# Altium PCB Rev 1.0.PcbDoc
Units mil, origin at the board's own origin, x right, y up, seen from the top; angles counter-clockwise.
Board outline 19020 x 8775 mil, 2 copper layers (Top Layer, Bottom Layer); 52 components, 22 nets, 145 pads, 0 vias.
Unrouted connection lines stored in the file: 7.
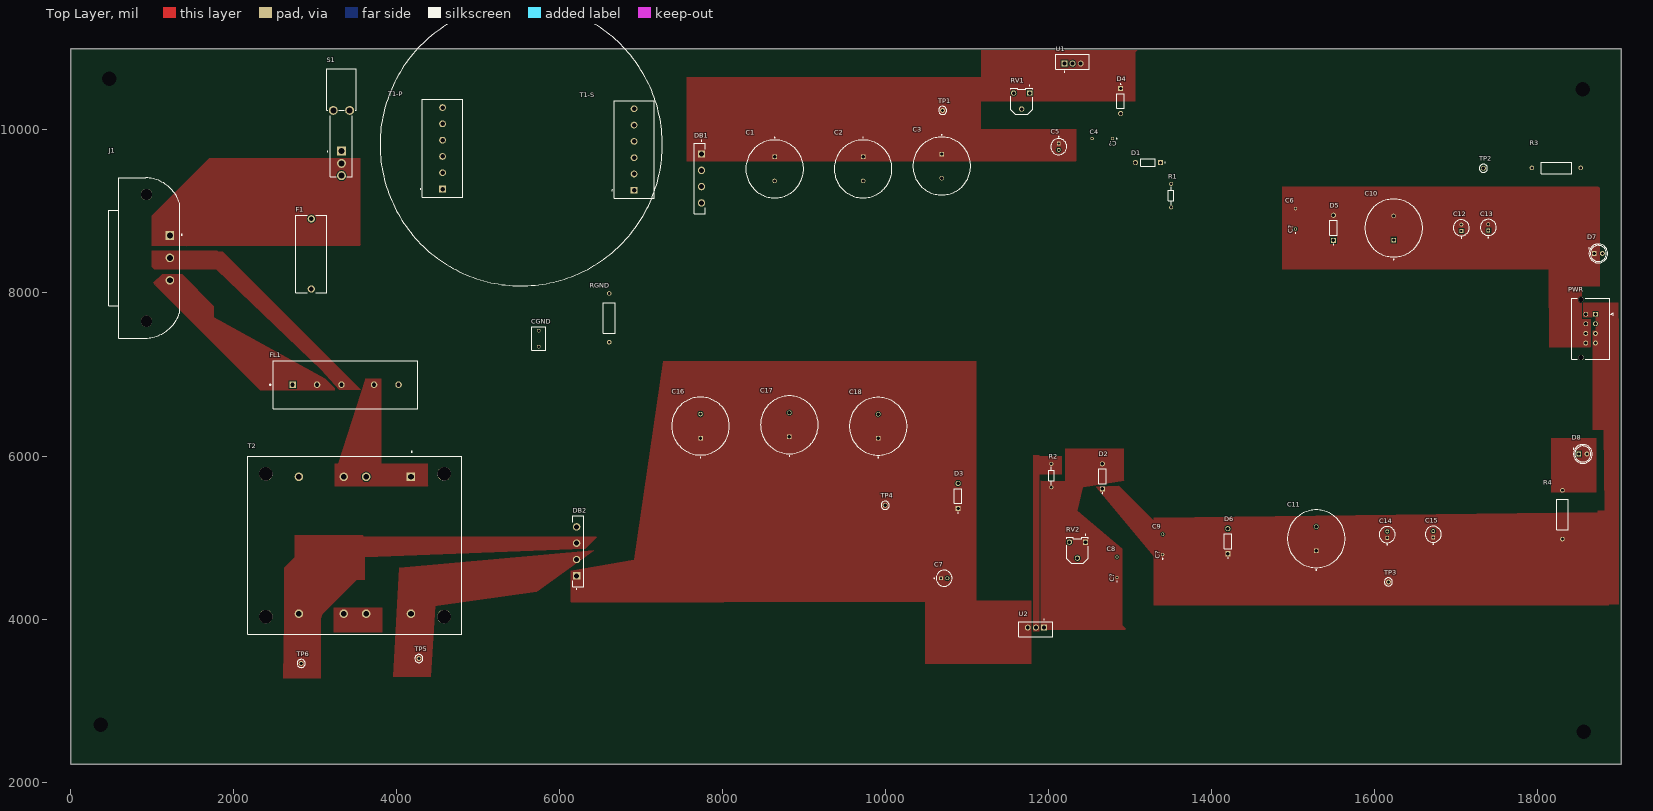
[diagram p0: Top Layer view]
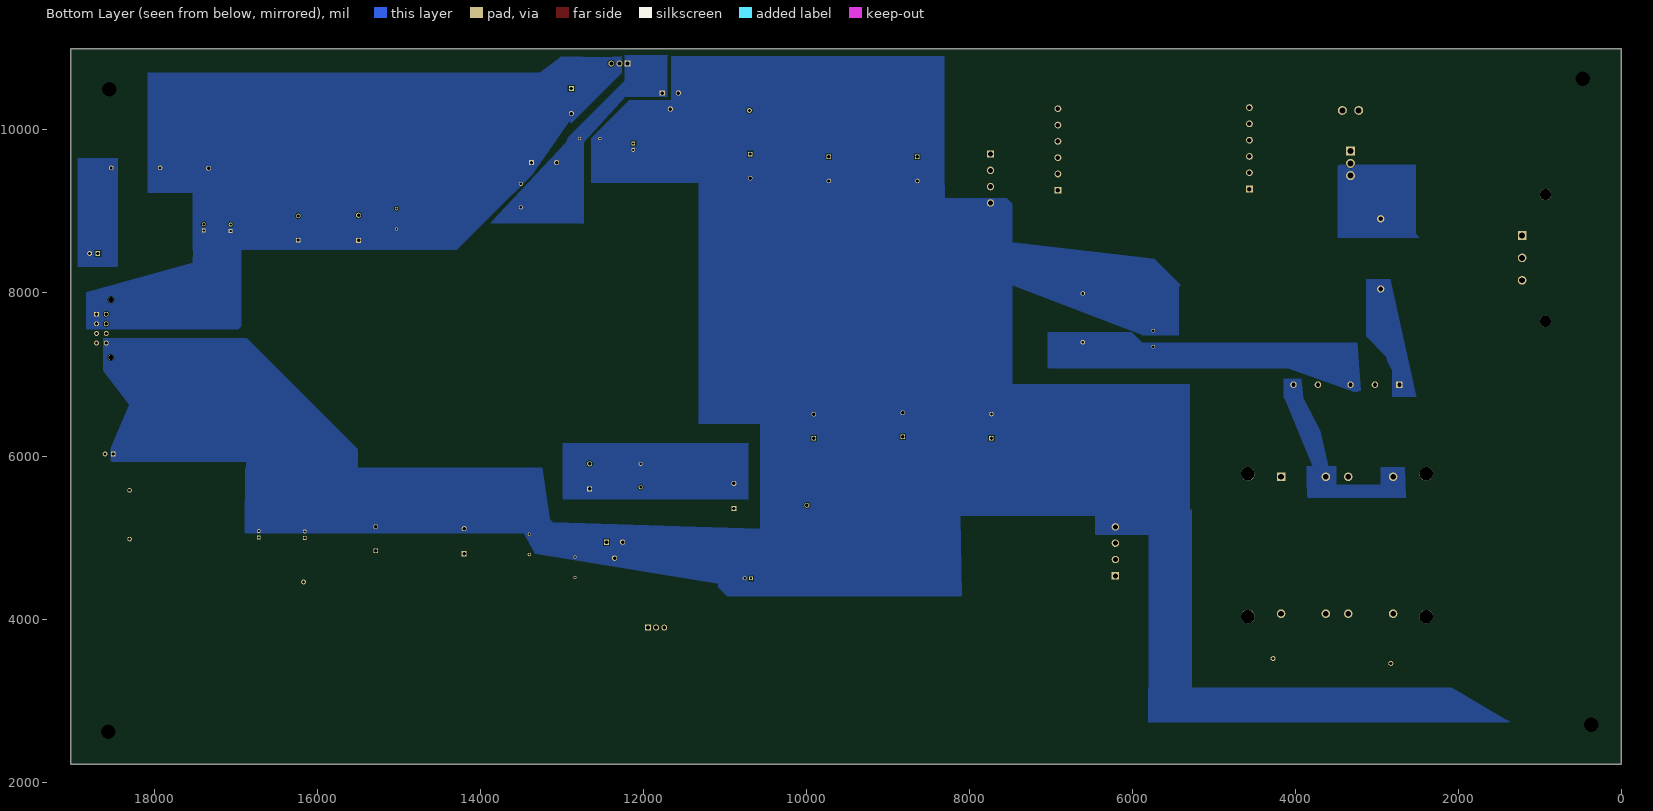
[diagram p1: Bottom Layer view, seen from below]
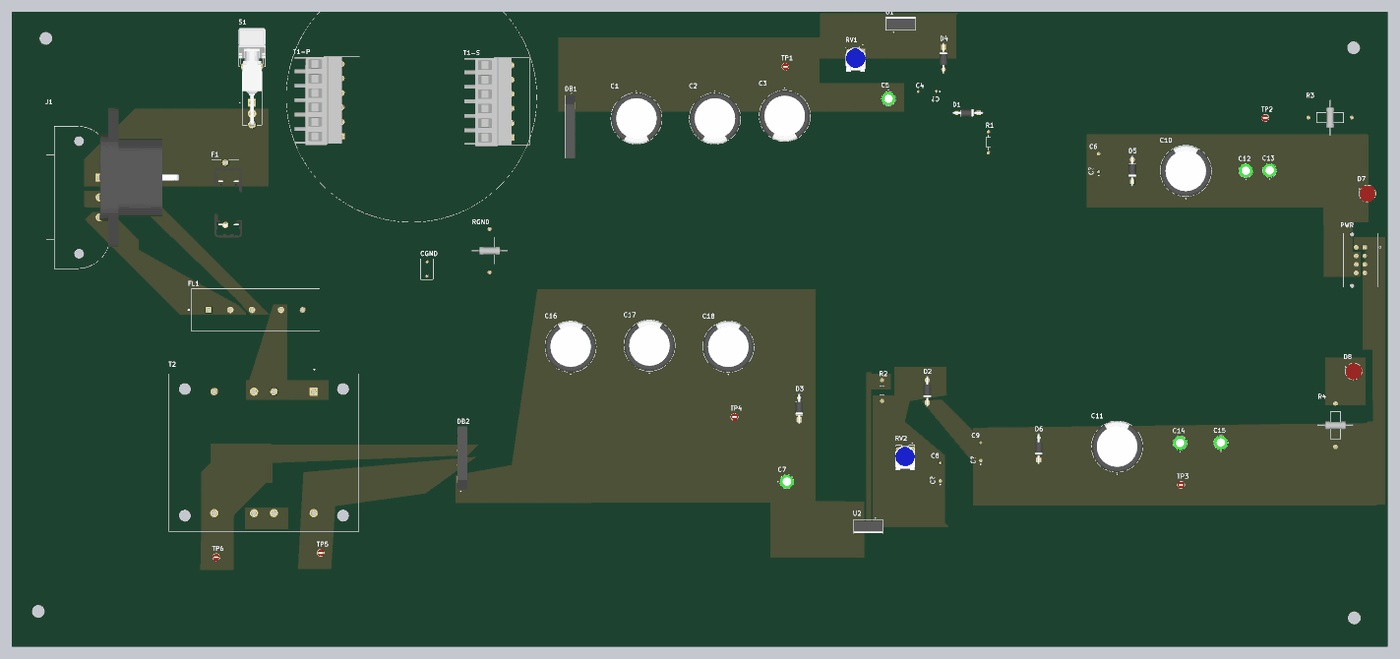
[diagram p2: 3D render of the assembled board from above, using the file's embedded part models]

## Layer stack, top to bottom
Top Solder: solder mask 0.4, Solder Resist, Dk 3.5
Top Layer: signal copper 1.4
Dielectric 1: dielectric 12.6, FR-4, Dk 4.8
Bottom Layer: signal copper 1.4
Bottom Solder: solder mask 0.4, Solder Resist, Dk 3.5

## Board outline
0,2220 19020,2220 19020,10995 0,10995

## Design rules (kind name [scope] priority, off if disabled: settings)
Clearance [All] p1: gap=10 ignorepadtopadclearanceinfootprint=FALSE except(0: Arc-Hole Track-Hole SMDPad-Hole THPad-Hole Via-Hole Fill-Hole Poly-Hole Region-Hole Text-Hole)
PolygonConnect [All] p1: connectstyle=Relief reliefconductorwidth=10 reliefentries=4 polygonreliefangle="90 Angle" airgapwidth=10
RoutingVias [All] p1: holewidth=28 width=50 viastyle="Through Hole" minholewidth=28 minwidth=50 maxholewidth=28 maxwidth=50
SolderMaskExpansion [All] p1: expansion=4 istentingtop=FALSE
Width [All] p1: maxlimit=10 minlimit=10 preferedwidth=10
30 further rules are at their usual default settings.

## Components (designator, comment, footprint, x,y, rotation, side; value= is the part's Value field where it differs from the comment)
C1 "UVZ1H332MHD" CAPPRD750W80D1800H3550 8635,9522.36 r270 top
C2 "UVZ1H332MHD" CAPPRD750W80D1800H3550 9720,9522.36 r270 top
C3 "UVZ1H332MHD" CAPPRD750W80D1800H3550 10685,9557.36 r270 top
C4 "10u" "6.35mm Tantalum Radial" 12780,9895 r180 top
C5 "0.1u" CAPPRD200W50D550H1250 12120,9795 r270 top
C6 "1u" "6.35mm Tantalum Radial" 15025,8785 r90 top
C7 "0.1u" CAPPRD200W50D550H1250 10714.37,4500 r0 top
C8 "10u" "6.35mm Tantalum Radial" 12835,4510 r90 top
C9 "1u" "6.35mm Tantalum Radial" 13395,4790 r90 top
C10 "4700u" CAPPRD750W80D1800H3550 16230,8797.36 r90 top
C11 "4700u" CAPPRD750W80D1800H3550 15280,4985 r90 top
C12 "0.1u" CAPPRD200W50D550H1250 17060,8800 r90 top
C13 "0.1u" CAPPRD200W50D550H1250 17390,8805 r90 top
C14 "0.1u" CAPPRD200W50D550H1250 16150,5035 r90 top
C15 "0.1u" CAPPRD200W50D550H1250 16715,5040 r90 top
C16 "UVZ1H332MHD" CAPPRD750W80D1800H3550 7725,6367.36 r90 top
C17 "UVZ1H332MHD" CAPPRD750W80D1800H3550 8815,6382.64 r90 top
C18 "UVZ1H332MHD" CAPPRD750W80D1800H3550 9905,6365 r90 top
CGND "0.1u Film" CAPRR500W50L730T450H950 5740,7440 r90 top
D1 "1N4007-T" DIOAD780W78L463D236 13215,9600 r180 top
D2 "1N4007-T" DIOAD780W78L463D236 12655,5750 r90 top
D3 "1N4007-T" DIOAD780W78L463D236 10885,5510 r90 top
D4 "1N4007-T" DIOAD780W78L463D236 12880,10355 r270 top
D5 "1N4007-T" DIOAD780W78L463D236 15490,8800 r90 top
D6 "1N4007-T" DIOAD780W78L463D236 14195,4955 r90 top
D7 "WP7113ID" LED_WP7113ID 18740,8485 r0 top
D8 "WP7113ID" LED_WP7113ID 18550,6025 r0 top
DB1 "GBU801" SIP343W114P508L2205H2134Q4 7715,9405 r270 top
DB2 "GBU801" SIP343W114P508L2205H2134Q4 6227.05,4830 r90 top
F1 "4527" FUSE_4527 2950,8480 r270 top
FL1 "FN406-3-02" FIL_FN406-3-02 3370,6875 r0 top
J1 "703W-00/52" QUALTEK_703W-00/52 1215,8706.18 r270 top
PWR "452800801" MOLEX_452800801 18705,7740 r90 top
R1 "270" RESAD730W45L360D200 13500,9195 r90 top
R2 "270" RESAD730W45L360D200 12030,5760 r90 top
R3 "1.1k" RESAD1520W70L1030D380 18225,9535 r0 top
R4 "200" RESAD1520W70L1030D380 18300,5280 r90 top
RGND "200" RESAD1520W70L1030D380 6605,7695 r90 top
RV1 "5k" TRIM_3306F-1-502 11665,10355 r90 top
RV2 "1k" TRIM_3306F-1-502 12350,4845 r90 top
S1 "300SP1J1BLKM7QE" SW_300SP1J1BLKM7QE 3320,9590 r270 top
T1-P "282847-6" TE_282847-6 4560,9775 r90 top
T1-S "282847-6" TE_282847-6 6910,9760 r90 top
T2 "VPP10-3000" XFMR_VPP10-3000 3485,4905 r270 top
TP1 "5000" KEYSTONE_5000 10695,10240 r0 top
TP2 "5000" KEYSTONE_5000 17330,9530 r0 top
TP3 "5000" KEYSTONE_5000 16165,4455 r0 top
TP4 "5000" KEYSTONE_5000 9990,5395 r0 top
TP5 "5000" KEYSTONE_5000 4270,3515 r0 top
TP6 "5000" KEYSTONE_5000 2825,3455 r0 top
U1 "LM338T" TO254P1054X470X1955-3 12290,10815 r0 top
U2 "LM338T" TO254P1054X470X1955-3 11840,3895 r180 top

## Footprints (in the part's own frame and the unit in brackets; to place one, negate y for a bottom-side part, rotate by r counter-clockwise, add the part's x,y. Pads: shape width x height; smd on the part's side, far side on the other; paste and mask are expansions set on the pad)
"6.35mm Tantalum Radial" [mil]
  round 40 hole 25: N(250,0) P(0,0)
  silkscreen extent -55,-5 -45,5
CAPPRD200W50D550H1250 [mm]
  rect 1.208x1.208 hole 0.7: 1(-1,0)
  round 1.208 hole 0.7: 2(1,0)
  silkscreen extent -3.2,-2.5 2.5,2.5, body extent -2.5,-2.49 2.5,2.49, height 12
CAPPRD750W80D1800H3550 [mm]
  round 1.4 hole 1.05: N(3.75,0)
  rect 1.4x1.4 hole 1.05: P(-3.75,0)
  silkscreen extent -9.85,-9 9,9, body extent -8.97,-9 9,9, height 35.5
CAPRR500W50L730T450H950 [mm]
  round 1.1 hole 0.75: 1(-2.5,0) 2(2.5,0)
  silkscreen extent -3.65,-2.25 3.65,2.25
DIOAD780W78L463D236 [mm]
  round 1.59 hole 1.06: A(3.905,0)
  rect 1.59x1.59 hole 1.06: K(-3.905,0)
  silkscreen extent -5.35,-1.18 2.32,1.18, body extent -5.47,-1.35 5.47,1.35, height 2.68
FIL_FN406-3-02 [mm]
  rect 2.03x2.03 hole 1.35: 1(-16.51,0)
  round 2.03 hole 1.35: 2(-8.89,0) 3(-1.27,0) 4(8.89,0) 5(16.51,0)
  silkscreen extent -23.7,-7.5 22.5,7.5
FUSE_4527 [mm]
  round 2.25 hole 1.5: 1(-10.92,0) 2(10.92,0)
  silkscreen extent -12.08,-4.85 12.08,4.85, body extent -8.9,-3.75 15.26,5.95, height 4.55
KEYSTONE_5000 [mm]
  round 1.53 hole 1.02: TP(0,0)
  silkscreen extent -1.27,-1.27 1.27,1.27, body extent -1.26,-1.27 1.26,1.27, height 4.57
LED_WP7113ID [mm]
  round 1.508 hole 1: A(1.27,0)
  rect 1.508x1.508 hole 1: C(-1.27,0)
  silkscreen extent -3.03,-2.95 2.95,2.95, body extent -2.5,-2.95 2.93,2.95, height 9.6
MOLEX_452800801 [mm]
  rect 1.505x1.505 hole 1.005 mask+0.076: 1(0,0)
  round 1.505 hole 1.005 mask+0.076: 2(-3,0) 3(-6,0) 4(-9,0) 5(0,3) 6(-3,3) 7(-6,3) 8(-9,3)
  round 1.57 hole 1.57 unplated mask+0.076: ""(-13.5,4.45) ""(4.5,4.45)
  silkscreen extent -14,-5.49 5,7.45
QUALTEK_703W-00/52 [mm]
  rect 2.7x2.7 hole 1.8: 1(0,0)
  round 2.7 hole 1.8: 2(7,0) 3(14,0)
  round 3.5 hole 3.5 unplated: ""(-12.75,-7.3) ""(26.75,-7.3)
  silkscreen extent -18,-19 32,3.85, body extent -25.05,0 25.05,27.79, height 11.5
RESAD730W45L360D200 [mm]
  round 1.238 hole 0.73: 1(-3.65,0) 2(3.65,0)
  silkscreen extent -2.8,-0.85 2.8,0.85
RESAD1520W70L1030D380 [mm]
  round 1.408 hole 0.9: 1(-7.6,0) 2(7.6,0)
  silkscreen extent -4.75,-1.8 4.75,1.8, body extent -1.39,-6.3 1.39,6.3, height 1.4
SIP343W114P508L2205H2134Q4 [mm]
  round 2.31 hole 1.54: AC1(-2.54,0.56) AC2(2.54,0.56) NEG(7.62,0.56)
  rect 2.31x2.31 hole 1.54: POS(-7.62,0.56)
  silkscreen extent -11.86,-1.72 11.02,1.72, body extent -11.02,-1.72 11.02,1.72, height 21.55
SW_300SP1J1BLKM7QE [mm]
  rect 2.775x2.775 hole 1.85: 1(-3.81,0)
  round 2.775 hole 1.85: 2(0,0) 3(3.81,0) S1(-16.51,-2.54) S2(-16.51,2.54)
  silkscreen extent -29.54,-4.63 4.19,4.63, body extent -30.14,-4.72 4.19,4.72, height 17.1
TE_282847-6 [mm]
  rect 2.1x2.1 hole 1.4: 1(-12.7,0)
  round 2.1 hole 1.4: 2(-7.62,0) 3(-2.54,0) 4(2.54,0) 5(7.62,0) 6(12.7,0)
  silkscreen extent -15.24,-6.25 15.24,6.95, body extent -15.74,0 15.24,17.14, height 4.18
TO254P1054X470X1955-3 [mm]
  rect 1.86x1.86 hole 1.24: 1(-2.54,0)
  round 1.86 hole 1.24: 2(0,0) 3(2.54,0)
  silkscreen extent -5.27,-2.64 5.27,2.86, body extent -5.08,-1.49 5.08,2.71, height 22.86
TRIM_3306F-1-502 [mm]
  rect 1.65x1.65 hole 1.1: 1(2.5,-2.5)
  round 1.65 hole 1.1: 2(-2.5,0) 3(2.5,2.5)
  silkscreen extent -4.05,-3.4 4.9,3.4, body extent -4.7,-3.4 3.4,3.4, height 8.38
XFMR_VPP10-3000 [mil]
  rect 105x105 hole 70: 1(-840,687.5)
  round 105 hole 70: 3(-840,137.5) 4(-840,-137.5) 6(-840,-687.5) 7(840,687.5) 9(840,137.5) 10(840,-137.5) 12(840,-687.5)
  round 166 hole 166 unplated: ""(-875,1093.5) ""(-875,-1093.5) ""(875,1093.5) ""(875,-1093.5)
  silkscreen extent -1153,-1313 1094,1313

## Part data
C1 C2 C3 C4 C6 C8 C9 C10 C11 C16 C17 C18: library part ECA1VHG472, "NHG-A", Package=None, Availability=Unavailable, MF="{'manufacturer': u'Panasonic'}", MP=ECA1VHG472, Price=None
C5 C7 C12 C13 C14 C15: library part UVR1H0R1MDD, "0.47ÂµF 100V Aluminum Electrolytic Capacitors Radial, Can 2000 Hrs @ 85Â°C", Package=None, Availability=Unavailable, MF="{'manufacturer': u'Nichicon'}", MP=UVR1H0R1MDD, Price=None
CGND: library part B32529C3104K289, Package=None, Availability=Unavailable, MF="{'manufacturer': u'EPCOS'}", MP=B32529C3104K289, Price=None
D1 D2 D3 D4 D5 D6 DB1 DB2 F1 PWR S1 T1-P T1-S TP1 TP2 TP3 TP4 TP5 TP6: Package=None, Availability=Unavailable, Price=None
  D1 D2 D3 D4 D5 D6: MF="{'manufacturer': u'Diodes Incorporated'}", MP=1N4007-T
  DB1 DB2: MF="{'manufacturer': u'Diodes Inc.'}", MP=GBU801
  F1: MF="{'manufacturer': u'Keystone'}", MP=4527
  PWR: MF="{'manufacturer': u'Molex'}", MP=452800801
  S1: MF="{'manufacturer': u'E-Switch'}", MP=300SP1J1BLKM7QE
  T1-P T1-S: MF="{'manufacturer': u'TE Connectivity'}", MP=282847-6
  TP1 TP2 TP3 TP4 TP5 TP6: MF="{'manufacturer': u'Keystone Electronics'}", MP=5000
D7 D8: "LED; Thru-Hole; Green; T1-3/4; 5mm; Clear Lens; 25ma; 565nm; 200mcd; Round", Package=None, Availability=Unavailable, MF="{'manufacturer': u'Kingbright'}", MP=WP7113ID, Price=None
FL1: "Single Phase EMC/EMI Line Filter 3A 250VAC DC ~ 400Hz Single Stage PC Pins", Package=None, Availability=Unavailable, MF="{'manufacturer': u'Schaffner EMC'}", MP=FN406-3-02, Price=None
J1: "3 Position 250 V 10 A Male Pins AC Receptacle Right Angle Connector", Package=None, Availability=Unavailable, MF="{'manufacturer': u'Qualtek'}", MP=703W-00/52, Price=None
R1 R2: library part CF18JT680R, "Res Carbon Film 680 Ohm 5% 0.125W(1/8W) -400ppm/C to 0ppm/C Conformal Coated AXL T/R", Package=None, Availability=Unavailable, MF="{'manufacturer': u'Stackpole Electronics'}", MP=CF18JT680R, Price=None
R3 R4 RGND: library part CBT50J5R1, "5.1 Ohms +/-5% 0.5W, 1/2W Through Hole Resistor Axial Pulse Withstanding Carbon Composition", Package=None, Availability=Unavailable, MF="{'manufacturer': u'TE Connectivity / AMP'}", MP=CBT50J5R1, Price=None
RV1 RV2: library part 3306F-1-502, "2 kOhms 0.2W, 1/5W PC Pins Through Hole Trimmer Potentiometer Cermet 1 Turn Top Adjustment", Package=None, Availability=Unavailable, MF="{'manufacturer': u'Bourns'}", MP=3306F-1-502, Price=None
T2: "Power Transformer 4000Vrms Dual Prim. Dual Sec. 230V/115V Prim. 10V/5V Sec. Through Hole", Package=None, Availability=Unavailable, MF="{'manufacturer': u'Triad Magnetics'}", MP=VPP10-3000, Price=None
U1 U2: library part LM338T/NOPB-ND

## Free pads (board coordinates)
  round 60 hole 177.17: 2(470,10630) 3(365,2705) 4(18560,2615) 5(18550,10500)

## Nets (pads, with @x,y where several pads share a name; then routed paths per layer and width w, separated by ;. In a path a pad name is that pad's centre, name@x,y a point inside that pad or via, vN(x,y) a via of type N, cw(c..) or ccw(c..) an arc to the next point about the centre after c; other vN are vias at no path point)
+5: C9.P C11.P C14.1 C15.1 D2.K D3.A D6.K PWR.3 PWR.4 PWR.5 R2.2 R4.1 TP3.TP U2.2
+12: C7.1 C16.P C17.P C18.P D3.K DB2.POS TP4.TP U2.3
+24: C6.P C10.P C12.1 C13.1 D1.K D4.A D5.K PWR.1 PWR.2 R1.2 R3.1 TP2.TP U1.2
+32: C1.P C2.P C3.P C5.1 D4.K DB1.POS TP1.TP U1.3
_N: FL1.4 T1-P.3 T1-P.6 T2.1 T2.4
_P: FL1.5 T1-P.1 T1-P.4 T2.3 T2.6
Earth: CGND.1 FL1.3 J1.2 RGND.1
GND: C1.N C2.N C3.N C4.N C5.2 C6.N C7.2 C8.N C9.N C10.N C11.N C12.2 C13.2 C14.2 C15.2 C16.N C17.N C18.N CGND.2 D5.A D6.A D7.C D8.C DB1.NEG DB2.NEG PWR.6 PWR.7 PWR.8 RGND.2 RV1.2 RV1.3 RV2.2 RV2.3
NetC4_P: C4.P D1.A R1.1 RV1.1 U1.1
NetC8_P: C8.P D2.A R2.1 RV2.1 U2.1
NetD7_A: D7.A R3.2
NetD8_A: D8.A R4.2
NetF1_1: F1.1 S1.3
NetF1_2: F1.2 FL1.1
NetFL1_2: FL1.2 J1.3
NetJ1_1: J1.1 S1.2
NetT1-S_3: T1-S.3 T1-S.4
NetT2_9: T2.9 T2.10
T1_O1: DB1.AC2 T1-S.1
T1_O2: DB1.AC1 T1-S.6
T2_O1: DB2.AC2 T2.12 TP6.TP
T2_O2: DB2.AC1 T2.7 TP5.TP
pads on no net: J1. PWR. S1.1 S1.S1 S1.S2 T1-P.2 T1-P.5 T1-S.2 T1-S.5 T2.

## Polygon pours and split planes (outlines as drawn)
T2_O2 on Top Layer (solid, pour order 58): 5717,4336.6 6422.98,4843.66 4030,4630 3955,3290 4415,3290 4470,4165 4495,4165
+5 on Top Layer (solid, pour order 158): 18870,4180 18990,4180 18990,7535 18989.7,7534.7 18985,7840 18985,7880 18555,7880 18555,7705 18710,7705 18710,7535 18675,7535 18675,6325 18808.97,6325 18816.37,5330 18734.64,5330 18735.02,5309.06 13290,5245 13285,5240 13285,5205 12855,5635 12575,5620 13285,4769.63 13285,4170 18870,4170
NetD8_A on Top Layer "NETD8_A_L01_P148" (solid, pour order 148): 18160,5555 18160,6215 18715,6215 18715,5555
NetJ1_1 on Top Layer (solid, pour order 129): 1424.93,8580 3545,8580 3555,8590 3549.18,8595.82 3549.18,9649.55 3560,9655 1700,9655 995,8950 995,8580 1410,8580 1415,8575
GND on Top Layer (solid, pour order 127): 18133.11,8290 18136.8,7335 18640,7335 18645,7340 18645,7680 18540,7680 18540,8085 18755,8085 18755,9290 18740,9305 14860,9305 14860,8290
NetC8_P on Top Layer (solid, pour order 114): 11900,3870 12935,3870 12945,3880 12900,3925 12900,4865 12345,5328.43 12415,5615 12420,5615 12930,5695 12920,5705 12920,6090 12200,6090 12200,5690 11911.98,5690 11900,5700
+5 on Top Layer (solid, pour order 109): 11810,3850 11880,3850 11880,5775 12155,5775 12155,5995 11880,5995 11880,6010 11810,6010
+32 on Top Layer (solid, pour order 88): 7555,9615 12330,9615 12335,9620 12335,10010 11170,10010 11165,10015 11165,10355 13060,10355 13060,10955 13085,10980 11170,10980 11170,10650 11165,10645 7555,10645
+12 on Top Layer (solid, pour order 82): 6130,4205 8010,4205 8010,4210 10485,4210 10485,3460 10475,3450 11785,3450 11785,4225 11110,4230.19 11110,7165 7265,7165 6910,4730 6135,4590 6135,4210
T2_O1 on Top Layer (solid, pour order 64): 3087,4057 3510,4480 3605,4480 3605,4759.17 6310,4865 6455,5010 3595,5010 3580,5025 2745,5025 2745,4760 2615,4630 2615,3980 2620,3980 2605,3275 3065,3275 3065,4004.06
_N on Top Layer (solid, pour order 45): 3235,5630 4380,5630 4385,5635 4380,5640 4380,5905 3810,5905 3810,6080 3810,6890 3810,6950 3615,6955 3281.28,5905 3235,5905 3235,5741.46 3235,5665
NetT2_9 on Top Layer "NETT2_9_L01_P030" (solid, pour order 30): 3225,4140 3820,4140 3820,3840 3225,3840
Earth on Top Layer (solid, pour order 27): 3295,6810 3560,6810 1862.5,8507.5 1792.5,8507.5 1800,8515 1795,8520 995,8520 995,8320 1025,8290 1785,8290 3080,7045 3080,7052.9
NetFL1_2 on Top Layer (solid, pour order 22): 1010,8120 2325,6805 3235,6805 3235,6830 3120,6945 1755,7705.13 1755,7840 1365,8230 1120,8230 1010,8120 1032.1,8113.59 1045.41,8100.28
GND on Bottom Layer (solid, pour order 147): 13466.46,5054.46 16885.43,5054.46 16880,5855 16870,5855 16870,5930 18520,5930 18530,5940 18530,6095 18305,6630 18620,7045 18620,7445 16865,7445 15500,6080 15500,5855 13235,5855 13145,5225 13105,5185 10564.53,5109.36 10564.53,6392.72 11324.53,6389.36 11314.53,6399.36 11314.53,9343.7 12634.53,9354.36 12634.53,9899.36 12169.53,10364.36 11654.53,10364.36 11654.53,10899.36 11649.53,10904.36 8304.53,10904.36 8304.53,9324.36 8299.53,9319.36 8299.53,9164.36 7539.53,9164.36 7469.53,9094.36 7469.53,8625 5730,8420 5405,8095 5425,8075 5425,7480 5875,7480 5880,7485 7469.53,8096.61 7469.53,6879.36 5289.53,6879.36 5289.53,5339.36 5269.53,5339.36 5269.53,3164.36 5274.53,3159.36 2074.53,3159.36 2063.06,3147.89 1388.35,2749.36 1364.53,2749.36 1373.38,2740.52 1364.57,2735.31 1378.6,2735.29 1379.53,2734.36 2074.53,2734.36 5799.53,2729.36 5799.53,3164.36 5794.53,3159.36 5794.53,5034.36 6454.53,5034.36 6449.53,5039.36 6449.53,5265.48 8106.5,5259.92 8089.53,4279.36 10964.53,4279.36 11074.53,4389.36 11074.53,4432.72 13324.24,4803.03
Earth on Bottom Layer (solid, pour order 139): 3265,6785 4093,7075 7025,7075 7035,7085 7035,7520 6005,7520 5875,7390 3235,7390 3195,6800
+24 on Bottom Layer (solid, pour order 134): 13830,8985 14285,8530 16930,8530 16930,7590 16965,7555 18830,7555 18830,8000 18835,8005 17525.74,8369.26 17520,8530 17525,8530 17525,9230 18075,9230 18075,10700 13895,10700 13270,10705 13000,10904.35 12480,10890 12260,10904.35 12260,10700 12880,10080 12906.13,10106.13 13367.94,9447.06
NetF1_1 on Bottom Layer "NETF1_1_L02_P130" (solid, pour order 130): 3325,8675 2470,8675 2520,8725 2520,9575 3460,9575 3475,9560 3475,8680
NetD7_A on Bottom Layer "NETD7_A_L02_P117" (solid, pour order 117): 18445,9655 18445,8315 18450,8320 18935,8320 18935,9655
+5 on Bottom Layer "+5_L02_P105" (solid, pour order 105): 10710,6165 10710,5470 12985,5470 12985,6150 12990,6155
NetC4_P on Bottom Layer (solid, pour order 94): 11705,10405 12205,10405 12214.34,10414.34 12725,9848.26 12725,8855 12735,8845 12745,8855 13870,8855 12945,9848.26 12920,9910 12225,10605 12225,10915 11705,10920
_P on Bottom Layer (solid, pour order 42): 3850,5600 3855,5605 3855,5875 3784.71,5875 4129.59,6709.66 4132.09,6707.16 4137.09,6712.16 4137.09,6947.16 3927.09,6947.16 3922.09,6952.16 3897.09,6707.16 3692.22,6310 3591.67,5875 3495,5875 3495,5650 2950,5650 2950,5860 2660,5860 2655,5855 2640,5490 3840,5490 3850,5500
NetF1_2 on Bottom Layer "NETF1_2_L02_P006" (solid, pour order 6): 2835,8170 3125,8170 3130,8175 3130,7470 2885,7225 2880,7210 2865,7150 2827.5,7081.25 2805,7047.5 2805,6725 2515,6725

## Other copper
Top Layer:
  pour cut-out: 1010,8120 1045.41,8100.28 1032.1,8113.59

## Silkscreen, mask and mechanical layers (free items; w line width, h text height)
Top Overlay:
  circle w0: c5525,9820 r1732.28

## Text inside footprints (layer, text, board x,y; h text height)
C4: Top Overlay "C?" at 12830,9860 h60 r180
C6: Top Overlay "C?" at 14990,8735 h60 r90
C8: Top Overlay "C?" at 12800,4460 h60 r90
C9: Top Overlay "C?" at 13360,4740 h60 r90